# Altium PCB PCB1.PcbDoc
Units mm, origin at the board's own origin, x right, y up, seen from the top; angles counter-clockwise.
Board outline 152.4 x 101.6 mm, 2 copper layers (Top Layer, Bottom Layer); 45 components, 28 nets, 110 pads, 4 vias.
Unrouted connection lines stored in the file: 1.
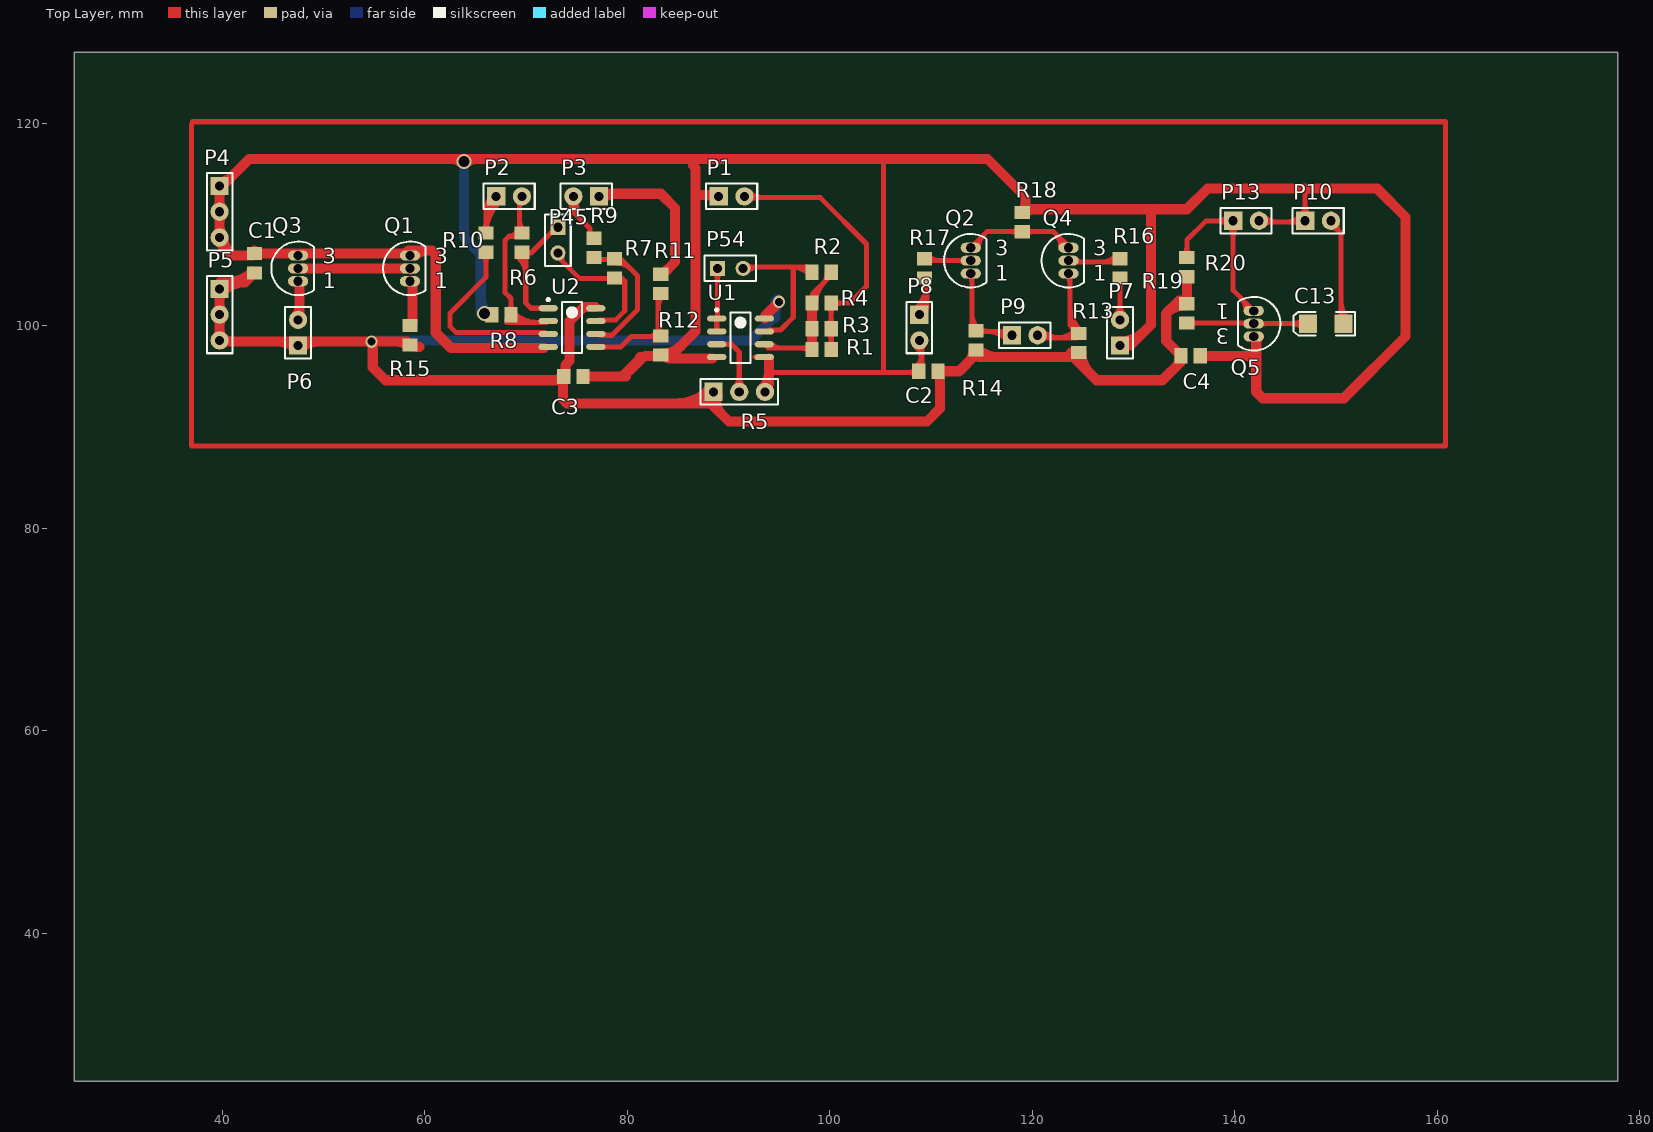
[diagram p0: Top Layer view]
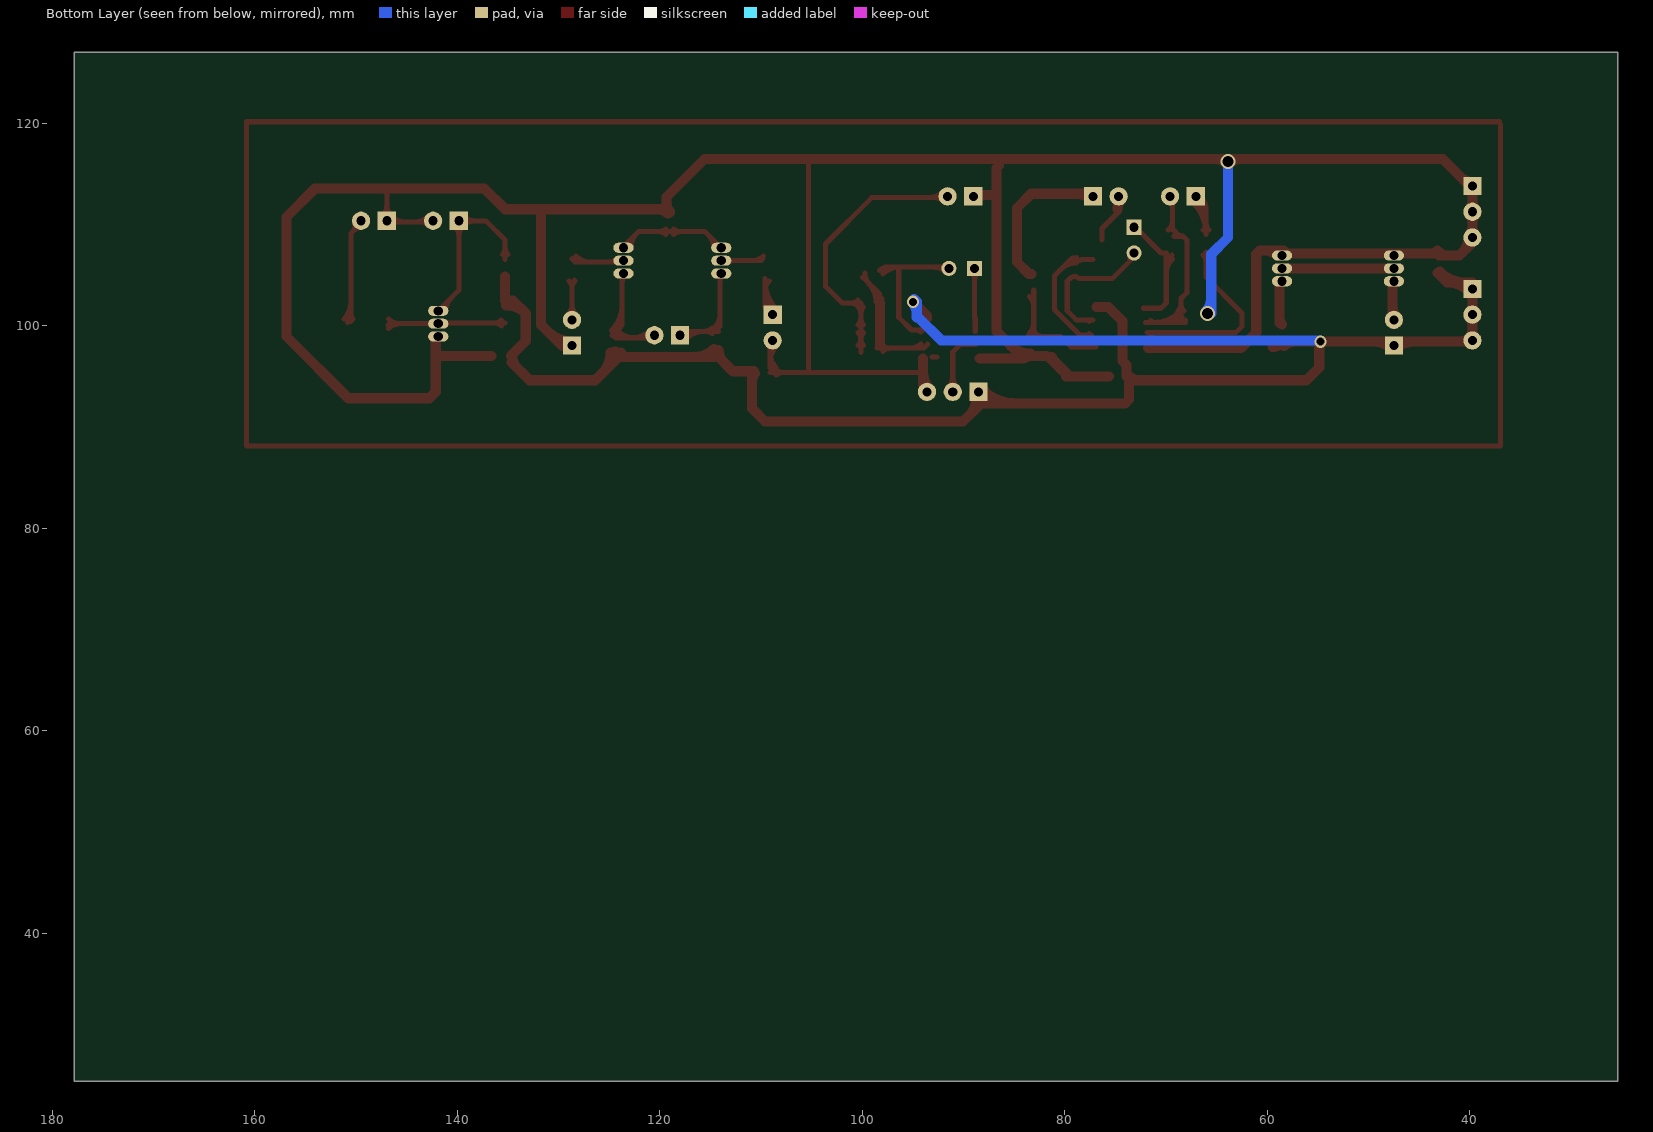
[diagram p1: Bottom Layer view, seen from below]

## Layer stack, top to bottom
Top Layer: signal copper 0.0356
Dielectric: dielectric 0.32, FR-4, Dk 4.8
Bottom Layer: signal copper 0.0356

## Board outline
25.4,25.4 177.8,25.4 177.8,127 25.4,127

## Design rules (kind name [scope] priority, off if disabled: settings)
Clearance [All] p1: gap=0.2
ComponentClearance [All] p1: gap=0.254 collisioncheckmode=3 verticalgap=0.254
PolygonConnect [All] p1: connectstyle=Relief reliefconductorwidth=0.254 reliefentries=4 polygonreliefangle="90 Angle"
RoutingVias [All] p1: holewidth=0.711 width=1.27 viastyle="Through Hole" minholewidth=0.711 minwidth=1.27 maxholewidth=0.711 maxwidth=1.27
SolderMaskExpansion [All] p1: expansion=0.102
TestPointUsage [All] p1: valid=0 allowmultiple=FALSE
Testpoint [All] p1: side=15 testpointundercomponent=TRUE minsize=1.016 maxsize=2.54 preferedsize=1.524 minholesize=0 maxholesize=1.016 preferedholesize=0.813 testpointgrid=0.025 style=1023 order=0-112345678
Width [All] p1: maxlimit=2 minlimit=0.254 preferedwidth=0.254 minimp=50.000000 maximp=50.000000 favimp=50.000000
18 further rules are at their usual default settings.

## Classes and differential pairs
component class Sheet1: C1 C2 C3 P1 P2 P3 P4 P5 P45 P54 R1 R2 R3 R4 R5 R6 R7 R8 R9 R10 R11 R12 U1 U2
component class Sheet2: C4 C13 P6 P7 P8 P9 P10 P13 Q1 Q2 Q3 Q4 Q5 R13 R14 R15 R16 R17 R18 R19 R20

## Components (designator, comment, footprint, x,y, rotation, side; value= is the part's Value field where it differs from the comment)
C1 "Cap" 6-0805 43.18,106.172 r90 top
C2 "Cap" 6-0805 109.728,95.504 r180 top
C3 "Cap" 6-0805 74.676,94.996 r0 top
C4 "Cap" 6-0805 135.636,97.028 r180 top
C13 "Cap Pol2" 3.2X1.6X1.1 148.971,100.203 r180 top
P1 "Header 2" HDR1X2#1 89.027,112.776 r0 top
P2 "Header 2" HDR1X2#1 67.056,112.776 r0 top
P3 "Header 2" HDR1X2#1 77.216,112.776 r180 top
P4 "Header 3" HDR1X3 39.751,113.792 r270 top
P5 "Header 3" HDR1X3 39.751,103.632 r270 top
P6 "Header 2" HDR1X2#1 47.498,98.044 r90 top
P7 "Header 2" HDR1X2#1 128.651,98.044 r90 top
P8 "Header 2" HDR1X2#1 108.839,101.092 r270 top
P9 "Header 2" HDR1X2#1 117.983,99.06 r0 top
P10 "Header 2" HDR1X2#1 146.939,110.363 r0 top
P13 "Header 2" HDR1X2#1 139.827,110.363 r0 top
P45 "Header 2" HDR1X2#2 73.152,109.728 r270 top
P54 "Header 2" HDR1X2#2 88.9,105.664 r0 top
Q1 "NPN" TO-226 58.547,105.664 r0 top
Q2 "NPN" TO-226 113.919,106.426 r0 top
Q3 "NPN" TO-226 47.498,105.664 r0 top
Q4 "NPN" TO-226 123.571,106.426 r0 top
Q5 "NPN" TO-226 141.859,100.203 r180 top
R1 "Res2" 6-0805 99.187,97.663 r180 top
R2 "Res2" 6-0805 99.187,105.283 r0 top
R3 "Res2" 6-0805 99.187,99.695 r180 top
R4 "Res2" 6-0805 99.187,102.235 r180 top
R5 "Res Tap" HDR1X3 88.519,93.472 r0 top
R6 "Res2" 6-0805 69.596,108.204 r90 top
R7 "Res2" 6-0805 78.74,105.664 r270 top
R8 "Res2" 6-0805 67.564,101.092 r0 top
R9 "Res2" 6-0805 76.708,107.696 r270 top
R10 "Res2" 6-0805 66.04,108.204 r270 top
R11 "Res2" 6-0805 83.312,104.14 r270 top
R12 "Res2" 6-0805 83.312,98.044 r90 top
R13 "Res2" 6-0805 124.587,98.298 r90 top
R14 "Res2" 6-0805 114.427,98.552 r90 top
R15 "Res2" 6-0805 58.547,99.06 r270 top
R16 "Res2" 6-0805 128.651,105.664 r270 top
R17 "Res2" 6-0805 109.347,105.664 r90 top
R18 "Res2" 6-0805 118.999,110.236 r90 top
R19 "Res2" 6-0805 135.255,101.219 r90 top
R20 "Res2" 6-0805 135.255,105.791 r270 top
U1 "LM358D" D008_L 91.186,98.806 r0 top
U2 "LM358D" D008_L 74.549,99.822 r0 top

## Footprints (in the part's own frame and the unit in brackets; to place one, negate y for a bottom-side part, rotate by r counter-clockwise, add the part's x,y. Pads: shape width x height; smd on the part's side, far side on the other; paste and mask are expansions set on the pad)
3.2X1.6X1.1 [mm] "SMT LED; 2 Flat Leads"
  rect 1.8x1.8 smd: 1(-1.75,0) 2(1.75,0)
  silkscreen extent -2.9,-1.15 3.2,1.15
6-0805 [mm] "Chip Resistor; Body 2.0 x 1.3 mm (LxW typ)"
  rect 1.3x1.5 smd: 1(-0.95,0) 2(0.95,0)
D008_L [mm] "SOIC, 8-Leads, Body 4.9x3.9mm, Pitch 1.27mm, IPC High Density"
  oval 1.9x0.6 smd: 1(-2.35,1.905) 2(-2.35,0.635) 3(-2.35,-0.635) 4(-2.35,-1.905) 5(2.35,-1.905) 6(2.35,-0.635) 7(2.35,0.635) 8(2.35,1.905)
  silkscreen extent -2.47,-2.5 1,2.88, body extent -2,-2.5 2,2.5, height 1.75
HDR1X2#1 [mm] "Connector; Header; 2 Position"
  rect 1.8x1.8 hole 0.9: 1(0,0)
  round 1.8 hole 0.9: 2(2.54,0)
  silkscreen extent -1.27,-1.27 3.81,1.27
HDR1X2#2 [mm] "Connector; Header; 2 Position"
  rect 1.5x1.5 hole 0.9: 1(0,0)
  round 1.5 hole 0.9: 2(2.54,0)
  silkscreen extent -1.27,-1.27 3.81,1.27
HDR1X3 [mm] "Connector; Header; 3 Position"
  rect 1.8x1.8 hole 0.9: 1(0,0)
  round 1.8 hole 0.9: 2(2.54,0) 3(5.08,0)
  silkscreen extent -1.27,-1.27 6.35,1.27
TO-226 [mm] "TO, Flat Index; 3 In-Line, Axial Leads; Body Dia. 4.8mm; Leads 0.55 x 0.51 mm (max)"
  oval 2x1 hole 0.9: 1(0,-1.27) 2(0,0) 3(0,1.27)
  silkscreen extent -2.65,-2.65 1.55,2.65

## Part data
C1 C2 C3 C4: "Capacitor"
C13: "Polarized Capacitor (Axial)"
P1 P2 P3 P6 P7 P8 P9 P10 P13 P45 P54: "Header, 2-Pin"
P4 P5: "Header, 3-Pin"
Q1 Q2 Q3 Q4 Q5: "NPN Bipolar Transistor"
R1 R2 R3 R4 R6 R7 R8 R9 R10 R11 R12 R13 R14 R15 R16 R17 R18 R19 R20: "Resistor"
R5: "Tapped Resistor"
U1 U2: "Dual Operational Amplifier"

## Via types
v1: diameter 1.5, hole 1.078, Top Layer to Bottom Layer, 2 vias
v2: diameter 1.2, hole 0.8, Top Layer to Bottom Layer, 2 vias

## Nets (pads, with @x,y where several pads share a name; then routed paths per layer and width w, separated by ;. In a path a pad name is that pad's centre, name@x,y a point inside that pad or via, vN(x,y) a via of type N, cw(c..) or ccw(c..) an arc to the next point about the centre after c; other vN are vias at no path point)
+12: C1.1 C2.1 C3.1 C4.2 P5.1 P5.2 P5.3 P6.1 R5.1 R13.1 R14.1 R15.2 R19.2 R20.2 U1.8 U2.8 | length 263.3
  Top Layer w0.5: R5.1@88.138,92.837 R5.1@88.519,92.837
  Top Layer w1: P5.1 39.751,98.679 40.005,98.425 58.232,98.425 R15.2@58.359,98.298 ; P5.1@39.751,104.267 42.225,104.267 ; C1.1 42.225,104.267 ; v2@54.864,98.171 54.864,95.885 56.134,94.615 C3.1@73.66,94.615 ; R15.2@58.753,98.216 ccw(c59.475,98.938) 59.475,97.917 ; 72.685,94.615 ccw(c72.685,95.937) C3.1@73.62,95.002 ; C3.1@73.66,94.869 73.66,92.71 74.041,92.329 88.011,92.329 88.138,92.456 ; C3.1@73.914,94.996 73.914,96.139 74.295,96.52 74.295,100.457 75.692,101.854 U2.8@76.835,101.854 ; 84.794,92.329 ccw(c84.794,97.197) R5.1@88.236,93.755 ; 87.208,92.329 ccw(c87.208,94.783) R5.1@88.943,93.048 ; 88.392,92.2 cw(c89.791,92.2) R5.1@88.802,93.189 ; R5.1@88.392,92.583 88.392,92.202 90.043,90.551 109.601,90.551 110.871,91.821 C2.1@110.871,94.996 ; U1.8@93.599,100.711 U1.8@93.599,100.965 ; U1.8@93.726,100.965 93.726,101.092 v2(94.996,102.362) ; C2.1 112.776,95.504 114.427,97.155 114.681,96.901 R13.1@124.206,96.901 ; R13.1@124.333,97.028 124.333,96.647 126.365,94.615 132.842,94.615 C4.2@134.62,96.393 ; C4.2 133.223,98.491 133.223,101.219 ; R19.2@135.001,102.489 134.493,102.489 ; R19.2@135.255,102.489 R20.2 ; 39.751,99.518 ccw(c40.717,99.518) P5.3@40.034,98.835 ; 39.751,99.518 cw(c38.785,99.518) 39.468,98.835 ccw(c38.785,99.518) 39.751,99.518 ; 39.751,99.518 ccw(c40.717,99.518) P5.3@40.034,98.835 ; 39.751,100.126 ccw(c38.785,100.126) 39.468,100.809 cw(c38.785,100.126) 39.751,100.126 ; 39.751,100.126 cw(c40.717,100.126) 40.034,100.809 ccw(c40.717,100.126) 39.751,100.126 ; 39.751,102.058 ccw(c40.717,102.058) 40.034,101.375 cw(c40.717,102.058) 39.751,102.058 ; 39.751,102.058 cw(c38.785,102.058) 39.468,101.375 ccw(c38.785,102.058) 39.751,102.058 ; 39.751,102.666 ccw(c38.785,102.666) 39.468,103.349 cw(c38.785,102.666) 39.751,102.666 ; 39.751,102.666 cw(c40.717,102.666) 40.034,103.349 ccw(c40.717,102.666) 39.751,102.666 ; P5.3@40.034,98.835 ccw(c41.023,99.824) 41.023,98.425 cw(c41.023,99.824) P5.3@40.034,98.835 ; 42.225,104.267 ccw(c42.225,101.193) 40.036,103.351 cw(c42.225,101.193) 42.225,104.267 ; 133.223,101.219 cw(c135.155,99.286) 135.155,102.019 ccw(c135.155,99.286) 133.223,101.219 ; 133.223,101.219 134.493,102.489 ; 134.493,102.489 cw(c134.493,101.938) 135.013,102.12 ccw(c134.493,101.938) 134.493,102.489 ; P5.1@40.412,104.267 ccw(c40.412,107.89) 42.974,105.328 cw(c40.412,107.89) P5.1@40.412,104.267 ; 45.613,98.425 cw(c45.613,96.159) 47.215,97.761 ccw(c45.613,96.159) 45.613,98.425 ; P6.1@47.781,97.761 cw(c49.383,96.159) 49.383,98.425 ccw(c49.383,96.159) P6.1@47.781,97.761 ; 57.324,98.425 cw(c57.324,96.987) 58.341,98.004 ccw(c57.324,96.987) 57.324,98.425 ; R5.1@87.957,93.683 ccw(c89.138,93.24) 88.246,92.348 cw(c89.138,93.24) R5.1@87.957,93.683 ; R5.1@88.894,93.332 ccw(c90.736,92.641) 89.344,91.25 cw(c90.736,92.641) R5.1@88.894,93.332 ; C2.1@110.572,95.298 cw(c109.85,94.576) 110.871,94.576 ccw(c109.85,94.576) C2.1@110.572,95.298 ; 113.684,96.412 ccw(c112.494,97.602) 114.177,97.602 cw(c112.494,97.602) 113.684,96.412 ; R14.1@114.633,97.708 ccw(c116.581,99.656) 116.581,96.901 cw(c116.581,99.656) R14.1@114.633,97.708 ; 123.046,96.901 ccw(c123.046,98.789) 124.381,97.454 cw(c123.046,98.789) 123.046,96.901 ; 123.837,97.348 ccw(c124.332,97.348) 123.982,96.998 cw(c124.332,97.348) 123.837,97.348 ; 124.333,96.63 cw(c125.182,96.63) 124.591,97.24 ccw(c125.182,96.63) 124.333,96.63 ; R13.1@124.837,97.348 ccw(c127.746,97.348) 125.689,95.291 cw(c127.746,97.348) R13.1@124.837,97.348 ; 134.002,101.998 cw(c134.561,101.439) 135.06,102.053 ccw(c134.561,101.439) 134.002,101.998 ; 134.098,95.871 ccw(c133.042,96.928) 134.536,96.928 cw(c133.042,96.928) 134.098,95.871
  Bottom Layer w1: v2@54.737,98.552 92.202,98.552 94.488,100.838 ; 94.615,100.838 94.615,102.362 v2@94.869,102.616 ; 94.615,101.201 cw(c96.157,101.201) v2@95.067,102.291
  other v2: 54.737,98.425
GND: C1.2 C2.2 C3.2 C4.1 P1.1 P4.1 P4.2 P4.3 P7.1 P8.2 P10.1 P13.2 Q1.3 Q3.3 Q5.3 R5.3 R8.1 R12.1 R18.2 U1.4 U1.5 U2.4 | length 408.2
  Top Layer w0.5: U1.5@92.609,96.901 U1.5@93.091,96.901 ; 94.107,95.504 94.234,95.377 C2.2@109.093,95.377 ; 105.283,95.504 105.283,115.951 ; C2.2 109.093,95.819 P8.2@109.093,98.425 ; P13.2@142.875,110.236 146.685,110.236 P10.1@146.939,109.982 ; P10.1 146.939,113.03 147.193,113.284 ; P10.1@146.479,110.823 cw(c145.063,112.239) 145.063,110.236 ccw(c145.063,112.239) P10.1@146.479,110.823 ; P10.1@146.479,110.823 ccw(c145.37,111.932) 146.939,111.932 ; P10.1@146.479,110.823 ccw(c145.37,111.932) 146.939,111.932 ; 146.939,111.932 ccw(c148.508,111.932) 147.399,110.823 cw(c148.508,111.932) 146.939,111.932 ; 107.747,95.377 ccw(c107.747,96.435) 108.495,95.687 cw(c107.747,96.435) 107.747,95.377 ; 107.878,95.377 cw(c107.878,94.504) 108.495,95.121 ccw(c107.878,94.504) 107.878,95.377 ; P8.2@108.379,98.092 cw(c106.657,96.37) 109.093,96.37 ccw(c106.657,96.37) P8.2@108.379,98.092 ; C2.2@108.495,95.887 ccw(c107.052,97.33) 109.093,97.33 cw(c107.052,97.33) C2.2@108.495,95.887 ; P8.2@108.733,98.446 cw(c107.864,97.577) 109.093,97.577 ccw(c107.864,97.577) P8.2@108.733,98.446 ; 109.093,97.596 cw(c109.795,97.596) 109.299,98.092 ccw(c109.795,97.596) 109.093,97.596 ; P13.2@142.827,109.903 cw(c143.63,109.1) 143.63,110.236 ccw(c143.63,109.1) P13.2@142.827,109.903 ; P13.2@142.827,110.823 ccw(c144.243,112.239) 144.243,110.236 cw(c144.243,112.239) P13.2@142.827,110.823 ; 145.676,110.236 cw(c145.676,109.1) 146.479,109.903 ccw(c145.676,109.1) 145.676,110.236
  Top Layer w1: P4.1 39.751,108.204 41.021,106.934 C1.2@43.053,106.934 ; P4.1@39.878,113.665 42.672,116.459 115.57,116.459 119.319,112.71 R18.2@119.319,111.506 ; C1.2@43.18,107.442 43.5,107.122 Q1.3@58.1,107.122 ; Q1.3@58.039,107.061 58.42,107.442 60.706,107.442 61.087,107.061 61.087,99.314 62.611,97.79 U2.4@71.755,97.79 ; Q1.3@58.613,107.122 Q1.3@58.801,106.934 ; Q1.3@59.047,106.934 cw(c60.273,105.708) 60.273,107.442 ; C3.2 79.883,94.996 ; 79.502,94.996 81.28,96.774 81.28,96.901 ; 80.137,95.504 81.534,96.901 ; 81.788,97.028 84.328,97.028 86.741,99.441 86.741,115.57 86.487,115.824 ; R12.1@83.518,97.2 ccw(c84.547,98.229) 84.547,96.774 ; R12.1@83.544,97.165 ccw(c84.201,97.521) 84.201,96.774 U1.4@88.392,96.774 ; 87.249,112.903 P1.1@88.265,112.903 ; R5.3@93.98,94.234 U1.5@93.98,96.774 ; R18.2 R18.2@119.319,111.506 ; P7.1 129.667,98.044 131.715,100.092 131.715,111.522 ; 131.445,111.506 R18.2@119.319,111.506 ; 132.08,111.506 135.255,111.506 137.287,113.538 154.051,113.538 156.845,110.744 156.845,98.933 150.749,92.837 142.748,92.837 142.113,93.472 Q5.3@142.113,98.806 ; C4.1 141.859,97.028 ; 39.751,109.678 ccw(c40.717,109.678) 40.034,108.995 cw(c40.717,109.678) 39.751,109.678 ; 39.751,109.678 cw(c38.785,109.678) 39.468,108.995 ccw(c38.785,109.678) 39.751,109.678 ; 39.751,110.286 ccw(c38.785,110.286) 39.468,110.969 cw(c38.785,110.286) 39.751,110.286 ; 39.751,110.286 cw(c40.717,110.286) 40.034,110.969 ccw(c40.717,110.286) 39.751,110.286 ; 39.751,112.218 ccw(c40.717,112.218) 40.034,111.535 cw(c40.717,112.218) 39.751,112.218 ; 39.751,112.218 cw(c38.785,112.218) 39.468,111.535 ccw(c38.785,112.218) 39.751,112.218 ; 39.751,112.826 ccw(c38.785,112.826) 39.468,113.509 cw(c38.785,112.826) 39.751,112.826 ; 39.751,112.826 cw(c40.717,112.826) 40.034,113.509 ccw(c40.717,112.826) 39.751,112.826 ; 129.617,98.044 ccw(c129.617,97.078) 128.934,97.761 cw(c129.617,97.078) 129.617,98.044 ; 129.617,98.044 cw(c129.617,99.01) 128.934,98.327 ccw(c129.617,99.01) 129.617,98.044 ; P4.1@39.751,114.192 ccw(c39.751,115.771) 40.867,114.654 cw(c39.751,115.771) P4.1@39.751,114.192 ; P4.3@40.151,108.706 ccw(c42.255,108.676) 40.767,107.188 cw(c42.255,108.676) P4.3@40.151,108.706 ; 42.264,106.934 ccw(c42.264,107.938) 42.974,107.228 cw(c42.264,107.938) 42.264,106.934 ; 62.664,116.459 cw(c62.664,114.988) 63.704,116.028 ccw(c62.664,114.988) 62.664,116.459 ; v1@64.058,116.028 cw(c65.098,114.988) 65.098,116.459 ccw(c65.098,114.988) v1@64.058,116.028 ; R12.1@83.412,97.244 ccw(c83.412,99.977) 85.344,98.044 cw(c83.412,99.977) R12.1@83.412,97.244 ; 87.755,112.903 cw(c87.755,111.504) 88.744,112.493 ccw(c87.755,111.504) 87.755,112.903 ; R5.3@93.316,93.755 ccw(c91.714,95.357) 93.98,95.357 cw(c91.714,95.357) R5.3@93.316,93.755 ; R18.2@118.993,111.292 ccw(c118.206,112.079) 119.319,112.079 cw(c118.206,112.079) R18.2@118.993,111.292 ; R18.2@119.205,111.08 cw(c120.234,110.051) 120.234,111.506 ccw(c120.234,110.051) R18.2@119.205,111.08 ; P7.1@128.651,98.444 ccw(c128.651,101.863) 131.068,99.445 cw(c128.651,101.863) P7.1@128.651,98.444 ; 142.113,98.339 cw(c142.953,98.339) 142.359,98.933 ccw(c142.953,98.339) 142.113,98.339
  Bottom Layer w1: v1(63.881,116.205) 63.881,108.712 65.532,107.061 v1@65.532,101.219 ; 65.532,102.742 ccw(c67.436,102.742) 66.09,101.396 cw(c67.436,102.742) 65.532,102.742
  other v1: 65.913,101.219
NetC13_1: C13.1 P10.2 | length 20.2
  Top Layer w0.5: P10.2@149.606,109.982 150.495,109.093 C13.1@150.495,100.429 ; P10.2@149.479,109.713 cw(c149.479,108.757) 150.155,109.433 ccw(c149.479,108.757) P10.2@149.479,109.713 ; P10.2@150.107,110.195 ccw(c151.081,109.933) 150.368,109.22 cw(c151.081,109.933) P10.2@150.107,110.195 ; C13.1@150.261,100.663 ccw(c149.697,101.227) 150.495,101.227 cw(c149.697,101.227) C13.1@150.261,100.663 ; 150.495,101.111 ccw(c151.629,101.111) 150.827,100.309 cw(c151.629,101.111) 150.495,101.111 ; 150.495,102.318 ccw(c152.836,102.318) 151.181,100.663 cw(c152.836,102.318) 150.495,102.318
NetC13_2: C13.2 Q5.2 R19.1 | length 22.2
  Top Layer w0.5: R19.1 141.793,100.269 Q5.2 ; Q5.2@142.494,100.203 146.685,100.203 C13.2@146.812,100.076 ; 136.321,100.269 ccw(c136.321,99.303) 135.638,99.986 cw(c136.321,99.303) 136.321,100.269 ; 136.321,100.269 cw(c136.321,101.235) 135.638,100.552 ccw(c136.321,101.235) 136.321,100.269 ; 142.963,100.203 ccw(c142.963,99.599) 142.536,100.026 cw(c142.963,99.599) 142.963,100.203 ; 142.963,100.203 cw(c142.963,100.807) 142.536,100.38 ccw(c142.963,100.807) 142.963,100.203 ; 145.652,100.203 ccw(c145.652,101.772) 146.761,100.663 cw(c145.652,101.772) 145.652,100.203 ; 145.652,100.203 cw(c145.652,98.634) 146.761,99.743 ccw(c145.652,98.634) 145.652,100.203 ; 140.596,100.269 cw(c140.596,99.44) 141.182,100.026 ccw(c140.596,99.44) 140.596,100.269
NetP1_2: P1.2 R1.1 R3.1 R4.1 | length 47.8
  Top Layer w0.5: P1.2@91.059,112.649 99.06,112.649 103.632,108.077 103.632,103.886 101.981,102.235 R4.1 R1.1@100.137,97.348 ; 100.137,98.629 ccw(c99.171,98.629) 99.854,99.312 cw(c99.171,98.629) 100.137,98.629 ; 100.137,98.629 cw(c101.103,98.629) 100.42,99.312 ccw(c101.103,98.629) 100.137,98.629 ; 100.137,98.729 ccw(c101.103,98.729) 100.42,98.046 cw(c101.103,98.729) 100.137,98.729 ; 100.137,98.729 cw(c99.171,98.729) 99.854,98.046 ccw(c99.171,98.729) 100.137,98.729 ; 100.137,100.761 ccw(c101.103,100.761) 100.42,100.078 cw(c101.103,100.761) 100.137,100.761 ; 100.137,100.761 cw(c99.171,100.761) 99.854,100.078 ccw(c99.171,100.761) 100.137,100.761 ; 100.137,101.169 ccw(c99.171,101.169) 99.854,101.852 cw(c99.171,101.169) 100.137,101.169 ; 100.137,101.169 cw(c101.103,101.169) 100.42,101.852 ccw(c101.103,101.169) 100.137,101.169 ; 101.103,102.235 ccw(c101.103,101.269) 100.42,101.952 cw(c101.103,101.269) 101.103,102.235 ; 101.103,102.235 cw(c101.103,103.201) 100.42,102.518 ccw(c101.103,103.201) 101.103,102.235 ; P1.2@92.027,112.316 cw(c92.83,111.513) 92.83,112.649 ccw(c92.83,111.513) P1.2@92.027,112.316 ; P1.2@92.027,113.236 ccw(c93.443,114.652) 93.443,112.649 cw(c93.443,114.652) P1.2@92.027,113.236
NetP2_1: P2.1 R10.1 | length 28.4
  Top Layer w0.5: R10.1 66.04,111.76 ; P2.1 66.04,111.76 ; 66.04,110.12 ccw(c67.006,110.12) 66.323,109.437 cw(c67.006,110.12) 66.04,110.12 ; 66.04,110.12 cw(c65.074,110.12) 65.757,109.437 ccw(c65.074,110.12) 66.04,110.12 ; 66.04,111.76 ccw(c65.147,112.653) 66.407,112.734 cw(c65.147,112.653) 66.04,111.76 ; 66.04,111.76 cw(c66.933,110.867) 67.014,112.127 ccw(c66.933,110.867) 66.04,111.76 ; R10.1@66.04,109.014 cw(c70.47,109.014) 67.493,112.295 ccw(c70.47,109.014) R10.1@66.04,109.014 ; 66.04,110.143 cw(c69.445,110.143) 67.157,112.665 ccw(c69.445,110.143) 66.04,110.143 ; 66.04,111.272 cw(c68.421,111.272) 66.821,113.035 ccw(c68.421,111.272) 66.04,111.272
NetP2_2: P2.2 R6.2 R8.2 U2.2 | length 34.3
  Top Layer w0.5: 68.072,100.33 U2.2@72.009,100.33 ; R8.2@68.514,100.584 68.514,102.682 67.945,103.251 67.945,108.458 68.326,108.839 ; R6.2@69.215,108.839 68.326,108.839 ; R6.2@69.342,109.474 P2.2@69.342,112.522 ; 68.326,108.839 ccw(c68.326,109.754) 69.14,109.336 cw(c68.326,109.754) 68.326,108.839 ; 68.514,102.158 ccw(c69.48,102.158) 68.797,101.475 cw(c69.48,102.158) 68.514,102.158 ; 68.514,102.158 cw(c67.548,102.158) 68.231,101.475 ccw(c67.548,102.158) 68.514,102.158 ; R8.2@68.09,100.568 ccw(c68.664,101.142) 68.664,100.33 cw(c68.664,101.142) R8.2@68.09,100.568 ; R8.2@68.443,100.921 ccw(c69.871,102.349) 69.871,100.33 cw(c69.871,102.349) R8.2@68.443,100.921 ; R8.2@68.797,101.275 ccw(c71.078,103.556) 71.078,100.33 cw(c71.078,103.556) R8.2@68.797,101.275 ; 69.342,110.491 ccw(c70.833,110.491) 69.779,109.437 cw(c70.833,110.491) 69.342,110.491 ; 71.122,100.33 ccw(c71.122,100.884) 71.514,100.492 cw(c71.122,100.884) 71.122,100.33
NetP3_1: P3.1 R11.1 | length 17.5
  Top Layer w1: P3.1@77.851,113.03 83.312,113.03 84.709,111.633 84.709,106.299 83.5,105.09 R11.1 ; P3.1@77.499,112.493 cw(c78.795,111.197) 78.795,113.03 ccw(c78.795,111.197) P3.1@77.499,112.493
NetP3_2: P3.2 R9.1 | length 7.1
  Top Layer w0.5: P3.2@74.549,112.649 74.549,111.379 76.327,109.601 R9.1@76.327,108.458
  Top Layer w1: P3.2@74.393,112.493 cw(c73.404,111.504) 74.803,111.504 ccw(c73.404,111.504) P3.2@74.393,112.493
NetP6_2: P6.2 Q3.1 | length 4.9
  Top Layer w1: P6.2@47.625,101.219 47.625,103.886 ; P6.2@47.215,100.867 ccw(c46.226,101.856) 47.625,101.856 cw(c46.226,101.856) P6.2@47.215,100.867
NetP7_2: P7.2 R16.2 | length 12
  Top Layer w0.5: R16.2@128.397,104.521 128.651,104.267 P7.2 ; 128.651,102.153 ccw(c130.22,102.153) 129.111,101.044 cw(c130.22,102.153) 128.651,102.153 ; 128.651,102.153 cw(c127.082,102.153) 128.191,101.044 ccw(c127.082,102.153) 128.651,102.153 ; 128.651,103.748 ccw(c127.685,103.748) 128.368,104.431 cw(c127.685,103.748) 128.651,103.748 ; 128.651,103.748 cw(c129.617,103.748) 128.934,104.431 ccw(c129.617,103.748) 128.651,103.748
NetP8_1: P8.1 R17.1 | length 19.8
  Top Layer w0.5: P8.1@109.093,101.346 109.601,101.854 R17.1@109.601,104.648 ; P8.1@108.379,101.552 ccw(c105.43,104.501) 109.601,104.501 cw(c105.43,104.501) P8.1@108.379,101.552 ; P8.1@108.733,101.198 ccw(c106.637,103.294) 109.601,103.294 cw(c106.637,103.294) P8.1@108.733,101.198 ; P8.1@109.086,100.845 ccw(c107.844,102.087) 109.601,102.087 cw(c107.844,102.087) P8.1@109.086,100.845 ; R17.1@109.164,104.431 cw(c108.11,103.377) 109.601,103.377 ccw(c108.11,103.377) R17.1@109.164,104.431
NetP9_1: P9.1 Q2.1 R14.2 | length 24.2
  Top Layer w0.5: Q2.1@114.046,104.902 114.046,99.949 R14.2@114.554,99.441 ; R14.2@114.173,99.441 117.348,99.441 P9.1@117.729,99.06 ; Q2.1@113.742,104.979 cw(c113.009,104.246) 114.046,104.246 ccw(c113.009,104.246) Q2.1@113.742,104.979 ; 114.046,101.146 ccw(c115.971,101.146) 114.61,99.785 cw(c115.971,101.146) 114.046,101.146 ; R14.2@114.81,99.219 cw(c115.345,98.684) 115.345,99.441 ccw(c115.345,98.684) R14.2@114.81,99.219 ; R14.2@114.81,99.785 ccw(c115.64,100.615) 115.64,99.441 cw(c115.64,100.615) R14.2@114.81,99.785 ; 115.494,99.441 cw(c115.494,96.571) 117.523,98.6 ccw(c115.494,96.571) 115.494,99.441 ; 116.701,99.441 cw(c116.701,97.778) 117.877,98.954 ccw(c116.701,97.778) 116.701,99.441
NetP9_2: P9.2 Q4.1 R13.2 | length 37.1
  Top Layer w0.5: P9.2@120.65,98.806 124.333,98.806 R13.2@124.46,98.933 ; Q4.1@123.698,104.902 123.698,100.076 R13.2@124.714,99.06 ; P9.2@120.629,99.166 ccw(c121.498,100.035) 121.498,98.806 cw(c121.498,100.035) P9.2@120.629,99.166 ; P9.2@120.983,98.6 cw(c121.479,98.104) 121.479,98.806 ccw(c121.479,98.104) P9.2@120.983,98.6 ; P9.2@120.983,99.52 ccw(c122.705,101.242) 122.705,98.806 cw(c122.705,101.242) P9.2@120.983,99.52 ; 122.454,98.806 ccw(c122.454,101.281) 124.204,99.531 cw(c122.454,101.281) 122.454,98.806 ; Q4.1@123.394,104.979 cw(c122.661,104.246) 123.698,104.246 ccw(c122.661,104.246) Q4.1@123.394,104.979 ; 123.661,98.806 ccw(c123.661,100.074) 124.558,99.177 cw(c123.661,100.074) 123.661,98.806 ; 123.698,100.911 ccw(c126.15,100.911) 124.416,99.177 cw(c126.15,100.911) 123.698,100.911 ; 123.698,102.119 ccw(c127.357,102.119) 124.77,99.531 cw(c127.357,102.119) 123.698,102.119 ; 123.777,99.997 cw(c123.027,99.248) 124.087,99.248 ccw(c123.027,99.248) 123.777,99.997 ; 123.871,99.903 ccw(c124.487,100.52) 124.487,99.648 cw(c124.487,100.52) 123.871,99.903
NetP13_1: P13.1 Q5.1 R20.1 | length 32.2
  Top Layer w0.5: R20.1@135.255,106.553 135.255,108.458 137.16,110.363 P13.1 ; P13.1@139.827,109.855 139.827,103.505 Q5.1 ; 135.255,107.707 ccw(c136.221,107.707) 135.538,107.024 cw(c136.221,107.707) 135.255,107.707 ; 135.255,107.707 cw(c134.289,107.707) 134.972,107.024 ccw(c134.289,107.707) 135.255,107.707 ; 138.258,110.363 ccw(c138.258,111.932) 139.367,110.823 cw(c138.258,111.932) 138.258,110.363 ; 138.258,110.363 cw(c138.258,108.794) P13.1@139.367,109.903 ; 138.258,110.363 cw(c138.258,108.794) P13.1@139.367,109.903 ; P13.1@139.367,109.903 cw(c138.258,108.794) 139.827,108.794 ; P13.1@139.367,109.903 cw(c138.258,108.794) 139.827,108.794 ; 139.827,108.794 cw(c141.396,108.794) 140.287,109.903 ccw(c141.396,108.794) 139.827,108.794 ; 140.579,102.753 cw(c139.298,101.473) 141.109,101.473 ccw(c139.298,101.473) 140.579,102.753
NetQ1_1: Q1.1 Q1.2 Q3.2 R15.1 | length 17.4
  Top Layer w1: Q3.2@47.879,105.664 Q1.2 Q1.2@58.674,105.537 ; R15.1@58.801,100.264 Q1.1@58.801,104.14 ; R15.1@58.541,100.116 ccw(c57.913,100.744) 58.801,100.744 cw(c57.913,100.744) R15.1@58.541,100.116 ; 58.801,103.8 cw(c59.641,103.8) 59.047,104.394 ccw(c59.641,103.8) 58.801,103.8
NetQ2_2: Q2.2 R17.2 | length 8.5
  Top Layer w0.5: Q2.2@113.411,106.426 110.109,106.426 ; 110.109,106.426 cw(c110.109,106.693) 109.844,106.661 ccw(c110.109,106.693) 110.109,106.426 ; 112.815,106.426 ccw(c112.815,107.03) 113.242,106.603 cw(c112.815,107.03) 112.815,106.426 ; 112.815,106.426 cw(c112.815,105.822) 113.242,106.249 ccw(c112.815,105.822) 112.815,106.426 ; R17.2@109.73,106.897 ccw(c110.867,108.034) 110.867,106.426 cw(c110.867,108.034) R17.2@109.73,106.897
NetQ2_3: Q2.3 Q4.3 R18.1 | length 24.9
  Top Layer w0.5: Q2.3 115.509,109.286 122.108,109.286 Q4.3@123.825,107.569 ; 117.933,109.286 ccw(c117.933,110.252) 118.616,109.569 cw(c117.933,110.252) 117.933,109.286 ; 117.933,109.286 cw(c117.933,108.32) 118.616,109.003 ccw(c117.933,108.32) 117.933,109.286 ; 120.065,109.286 ccw(c120.065,108.32) 119.382,109.003 cw(c120.065,108.32) 120.065,109.286 ; 120.065,109.286 cw(c120.065,110.252) 119.382,109.569 ccw(c120.065,110.252) 120.065,109.286 ; Q2.3@114.669,107.696 cw(c116.48,107.696) 115.199,108.976 ccw(c116.48,107.696) Q2.3@114.669,107.696 ; 122.201,109.193 cw(c120.704,107.696) 122.821,107.696 ccw(c120.704,107.696) 122.201,109.193 ; 123.054,108.34 cw(c122.411,107.696) 123.321,107.696 ccw(c122.411,107.696) 123.054,108.34
NetQ4_2: Q4.2 R16.1 | length 9.8
  Top Layer w0.5: Q4.2@123.825,106.299 128.336,106.299 R16.1 ; Q4.2@124.248,106.603 ccw(c124.981,107.336) 124.981,106.299 cw(c124.981,107.336) Q4.2@124.248,106.603 ; 126.825,106.299 ccw(c126.825,108.34) 128.268,106.897 cw(c126.825,108.34) 126.825,106.299
NetR1_2: R1.2 R2.2 R3.2 R4.2 U1.6 | length 28.7
  Top Layer w0.5: U1.6 93.917,97.79 R1.2@98.552,97.79 ; R4.2@98.298,102.489 98.298,103.124 ; R2.2@99.949,104.775 98.298,103.124 ; 98.298,103.124 ccw(c98.986,103.124) 98.512,102.625 cw(c98.986,103.124) 98.298,103.124 ; 98.298,103.124 cw(c97.792,103.124) 98.041,102.683 ccw(c97.792,103.124) 98.298,103.124 ; U1.6@94.221,98.206 ccw(c95.227,99.212) 95.227,97.79 cw(c95.227,99.212) U1.6@94.221,98.206 ; 97.206,97.79 cw(c97.206,96.732) 97.954,97.48 ccw(c97.206,96.732) 97.206,97.79 ; 97.337,97.79 ccw(c97.337,98.663) 97.954,98.046 cw(c97.337,98.663) 97.337,97.79 ; R4.2@98.137,102.335 cw(c99.653,102.335) 98.581,103.407 ccw(c99.653,102.335) R4.2@98.137,102.335 ; R4.2@98.637,102.335 cw(c101.36,102.335) 99.435,104.261 ccw(c101.36,102.335) R4.2@98.637,102.335 ; 99.299,104.125 ccw(c98.24,105.183) 99.737,105.183 cw(c98.24,105.183) 99.299,104.125
  Top Layer w1: R1.2@98.237,98.105 R4.2
NetR5_2: R5.2 U1.3 | length 11.7
  Top Layer w0.5: U1.3 90.297,98.171 91.059,97.409 R5.2@91.059,93.218 ; 91.059,95.041 ccw(c92.628,95.041) 91.519,93.932 cw(c92.628,95.041) 91.059,95.041 ; 91.059,95.041 cw(c89.49,95.041) 90.599,93.932 ccw(c89.49,95.041) 91.059,95.041
NetR7_1: R7.1 R9.2 U2.6 | length 17.5
  Top Layer w0.5: R9.2@77.216,106.553 78.359,106.553 R7.1@78.486,106.426 ; U2.6@77.343,99.06 78.486,99.06 81.026,101.6 81.026,104.902 R7.1@79.248,106.68 ; U2.6@77.584,99.222 ccw(c77.976,99.614) 77.976,99.06 cw(c77.976,99.614) U2.6@77.584,99.222 ; R7.1@78.84,106.214 cw(c78.84,104.104) 80.332,105.596 ccw(c78.84,104.104) R7.1@78.84,106.214 ; R7.1@78.84,106.714 cw(c78.84,105.811) 79.478,106.45 ccw(c78.84,105.811) R7.1@78.84,106.714
NetR10_2: R10.2 U2.3 | length 22.3
  Top Layer w0.5: R10.2 66.04,104.775 62.484,101.219 62.484,99.949 63.119,99.314 U2.3@71.882,99.314 ; 66.04,106.288 ccw(c65.074,106.288) 65.757,106.971 cw(c65.074,106.288) 66.04,106.288 ; 66.04,106.288 cw(c67.006,106.288) 66.323,106.971 ccw(c67.006,106.288) 66.04,106.288 ; 71.122,99.314 cw(c71.122,98.76) 71.514,99.152 ccw(c71.122,98.76) 71.122,99.314
NetR11_2: R11.2 R12.2 U2.5 | length 19.1
  Top Layer w0.5: U2.5 79.375,97.917 80.391,98.933 R12.2@83.251,98.933 ; R11.2@83.058,103.505 83.058,99.568 R12.2@83.566,99.06 ; 82.099,98.933 ccw(c82.099,100.107) 82.929,99.277 cw(c82.099,100.107) 82.099,98.933 ; 82.394,98.933 cw(c82.394,98.176) 82.929,98.711 ccw(c82.394,98.176) 82.394,98.933 ; 83.058,100.331 ccw(c84.549,100.331) 83.495,99.277 cw(c84.549,100.331) 83.058,100.331 ; 83.058,101.853 cw(c84.549,101.853) 83.495,102.907 ccw(c84.549,101.853) 83.058,101.853
OUT1: P54.2 R2.1 U1.7 | length 24.1
  Top Layer w0.5: P54.2@91.567,105.791 R2.1@97.729,105.791 ; U1.7@93.98,99.568 95.123,99.568 96.393,100.838 96.393,105.664 ; P54.2@91.794,105.31 cw(c92.954,104.15) 92.954,105.791 ccw(c92.954,104.15) P54.2@91.794,105.31 ; P54.2@91.794,106.018 ccw(c92.34,106.564) 92.34,105.791 cw(c92.34,106.564) P54.2@91.794,106.018 ; U1.7@94.221,99.406 cw(c94.613,99.014) 94.613,99.568 ccw(c94.613,99.014) U1.7@94.221,99.406 ; 96.286,105.791 cw(c96.286,103.432) 97.954,105.1 ccw(c96.286,103.432) 96.286,105.791 ; 97.493,105.791 cw(c97.493,104.639) 98.308,105.454 ccw(c97.493,104.639) 97.493,105.791
OUT2: P45.1 R6.1 U2.1 | length 17.3
  Top Layer w0.5: 69.977,102.235 R6.1@69.977,107.061 ; R6.1@69.977,107.188 70.485,107.188 P45.1@72.898,109.601 ; 70.104,102.108 70.485,101.727 U2.1 ; 69.369,106.58 cw(c67.903,105.114) 69.977,105.114 ccw(c67.903,105.114) 69.369,106.58 ; R6.1@69.413,106.971 cw(c68.052,105.61) 69.977,105.61 ccw(c68.052,105.61) R6.1@69.413,106.971
OUT3: P45.2 R7.2 U2.7 | length 15.2
  Top Layer w0.5: P45.2@73.533,107.188 73.533,106.426 75.311,104.648 R7.2@78.613,104.648 ; U2.7@77.216,100.584 78.867,100.584 79.756,101.473 79.756,104.394 R7.2@79.436,104.714 ; U2.7@77.584,100.422 cw(c77.976,100.03) 77.976,100.584 ccw(c77.976,100.03) U2.7@77.584,100.422 ; R7.2@78.806,104.808 cw(c79.029,104.187) 79.496,104.654 ccw(c79.029,104.187) R7.2@78.806,104.808
OUT4: P54.1 U1.1 U1.2 | length 10
  Top Layer w0.5: U1.2 U1.1@88.836,100.775 ; U1.1@88.9,100.775 P54.1 ; 88.9,104.457 ccw(c87.693,104.457) 88.546,105.31 cw(c87.693,104.457) 88.9,104.457 ; 88.9,104.457 cw(c90.107,104.457) 89.254,105.31 ccw(c90.107,104.457) 88.9,104.457
copper on no net: | length 311.3
  Top Layer w0.5: 36.957,119.888 36.957,88.138 160.782,88.138 160.782,90.678 160.782,120.142 157.988,120.142 37.084,120.142

## Text inside footprints (layer, text, board x,y; h text height)
Q1: Top Overlay "3" at 60.968,106.131 h1.52; Top Overlay "1" at 60.968,103.685 h1.52
Q2: Top Overlay "3" at 116.34,106.893 h1.52; Top Overlay "1" at 116.34,104.447 h1.52
Q3: Top Overlay "3" at 49.919,106.131 h1.52; Top Overlay "1" at 49.919,103.685 h1.52
Q4: Top Overlay "3" at 125.992,106.893 h1.52; Top Overlay "1" at 125.992,104.447 h1.52
Q5: Top Overlay "1" at 139.438,102.182 h1.52 r180; Top Overlay "3" at 139.438,99.736 h1.52 r180